# Altium PCB P3_Programming.PcbDoc
Units mil, origin at the board's own origin, x right, y up, seen from the top; angles counter-clockwise.
Board outline 600 x 650 mil, 2 copper layers (Top Layer, Bottom Layer); 2 components, 6 nets, 16 pads, 0 vias.
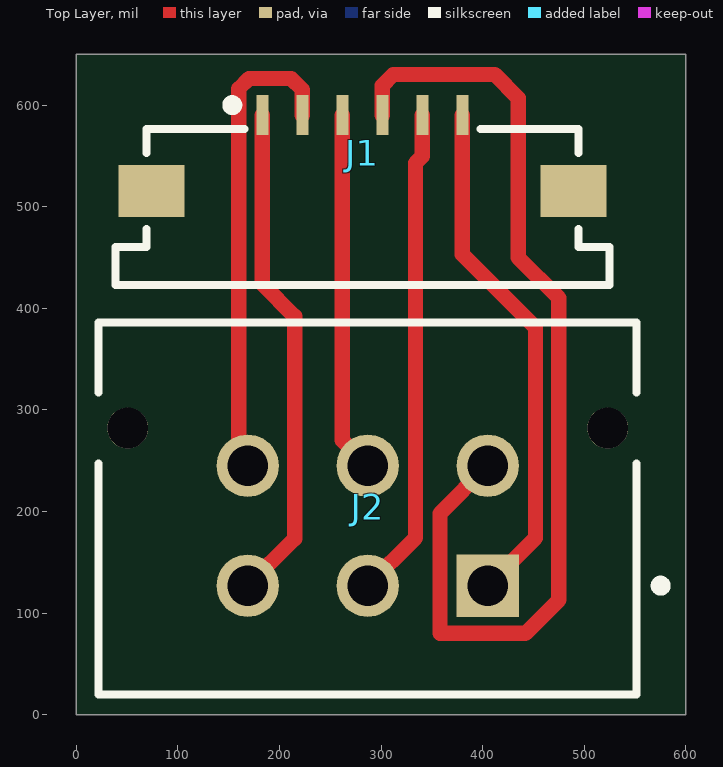
[diagram p0: Top Layer view]
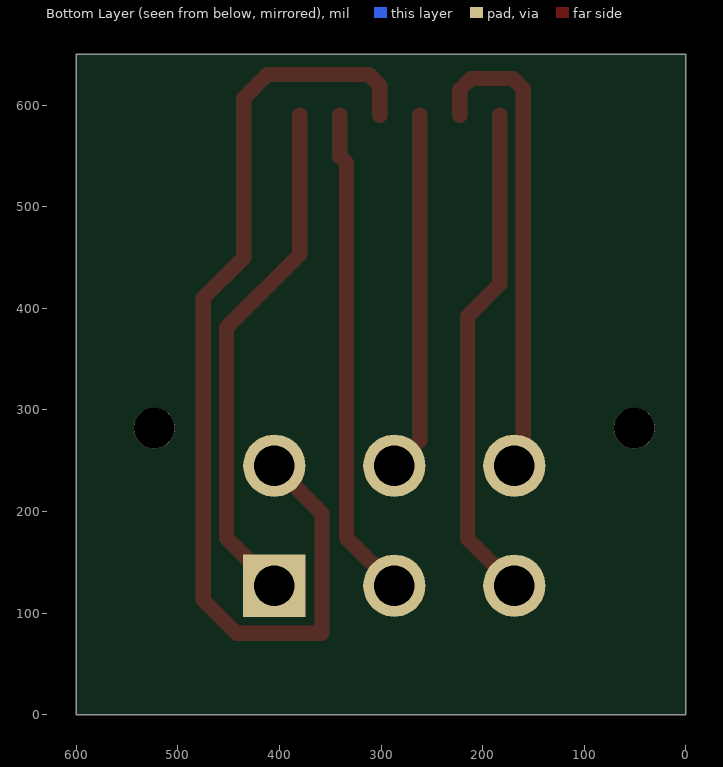
[diagram p1: Bottom Layer view, seen from below]

## Layer stack, top to bottom
Top Solder: solder mask 0.4, Solder Resist, Dk 3.5
Top Layer: signal copper 1.4
Dielectric 1: dielectric 12.6, FR-4, Dk 4.8
Bottom Layer: signal copper 1.4
Bottom Solder: solder mask 0.4, Solder Resist, Dk 3.5

## Board outline
0,0 600,0 600,650 0,650

## Design rules (kind name [scope] priority, off if disabled: settings)
BoardOutlineClearance [All] p1: gap=7.87 ignorepadtopadclearanceinfootprint=FALSE except(15.75: Arc-SplitBarrior Arc-SplitContinuation Track-SplitBarrior Track-SplitContinuation SMDPad-SplitBarrior SMDPad-SplitContinuation THPad-SplitBarrior THPad-SplitContinuation Via-SplitBarrior Via-SplitContinuation Fill-SplitBarrior Fill-SplitContinuation Poly-SplitBarrior Poly-SplitContinuation Region-SplitBarrior Region-SplitContinuation Text-SplitBarrior Text-SplitContinuation)
Clearance "Clearance Bottom Layer" [OnLayer('Bottom Layer')] p1: gap=8 ignorepadtopadclearanceinfootprint=TRUE except(10: Arc-Text Track-Text SMDPad-Text THPad-Text Via-Text Fill-Text Poly-Text Region-Text Text-Text)
Clearance "Clearance Top Layer" [OnLayer('Top Layer')] p2: gap=8 ignorepadtopadclearanceinfootprint=TRUE except(10: Arc-Text Track-Text SMDPad-Text THPad-Text Via-Text Fill-Text Poly-Text Region-Text Text-Text)
Clearance [All] p3: gap=7.87 ignorepadtopadclearanceinfootprint=FALSE except(3.5: Arc-Arc Arc-Track Arc-SMDPad Track-Track Track-SMDPad SMDPad-SMDPad; 5: Arc-Via Track-Via SMDPad-Via THPad-Via Via-Via; 10: Arc-Text Track-Text SMDPad-Text THPad-Text Via-Text Fill-Text Poly-Text Region-Text Text-Text)
HoleSize [All] p1: absolutevalues=TRUE maxlimit=248.03 minlimit=7.87 maxpercent=80.000 minpercent=20.000
MinimumAnnularRing [All] p1: minimumring=3
MinimumSolderMaskSliver [All] p1: minsoldermaskwidth=3.94
PolygonConnect PolygonConnect_1 [All] p1: thpad.connectstyle=Relief thpad.reliefconductorwidth=20 thpad.reliefentries=4 thpad.polygonreliefangle="90 Angle" thpad.airgapwidth=10 smdpad.connectstyle=Relief smdpad.reliefconductorwidth=20 smdpad.reliefentries=4 smdpad.polygonreliefangle="90 Angle" smdpad.airgapwidth=10 via.connectstyle=Direct via.reliefconductorwidth=20 via.reliefentries=4 via.polygonreliefangle="90 Angle" via.airgapwidth=10
RoutingCorners [All] p1: cornerstyle=Round minsetback=100 maxsetback=100
RoutingVias [All] p1: holewidth=19.68 width=39.37 viastyle="Through Hole" minholewidth=7.87 minwidth=17.72 maxholewidth=39.37 maxwidth=78.74
SilkToSilkClearance [All] p1: silktosilkclearance=3.94
SilkToSolderMaskClearance [IsPad] p1: minsilkscreentomaskgap=3.94 clearancetoexposedcopper=TRUE
SolderMaskExpansion [All] p1: expansion=4 istentingtop=FALSE
Width [All] p1: maxlimit=100 minlimit=3.5 preferedwidth=15
25 further rules are at their usual default settings.

## Components (designator, comment, footprint, x,y, rotation, side; value= is the part's Value field where it differs from the comment)
J1 "Communications" 686106183422 281.57,499.45 r0 top
J2 "AVR_1.1" FP-44914-0601-MFG 286.89,202.87 r0 top

## Footprints (in the part's own frame and the unit in brackets; to place one, negate y for a bottom-side part, rotate by r counter-clockwise, add the part's x,y. Pads: shape width x height; smd on the part's side, far side on the other; paste and mask are expansions set on the pad)
686106183422 [mm] "ZIF Connectors, Horizontal, Top Contact Low Profile, pitch 1mm, 6p"
  rect 0.3x1 smd: 1(-2.5,2.3) 2(-1.5,2.3) 3(-0.5,2.3) 4(0.5,2.3) 5(1.5,2.3) 6(2.5,2.3)
  rect 1.65x1.3 smd: M1(-5.275,0.4) M2(5.275,0.4)
  silkscreen extent -6.17,-1.95 6.17,2.67, body extent -6.1,-1.9 6.1,2.35, height 1.28
FP-44914-0601-MFG [mm]
  rect 1.555x1.555 hole 1.005 paste-2539.97 mask+0: 1(3,-1.93)
  round 1.555 hole 1.005 paste-2539.97 mask+0: 2(0,-1.93) 3(-3,-1.93) 4(3,1.07) 5(0,1.07) 6(-3,1.07)
  round 1.02 hole 1.02 unplated paste-2539.97 mask+0: ""(-6,2.01) ""(6,2.01)
  silkscreen extent -6.73,-4.65 7.45,4.65, body extent -6.83,-4.75 6.83,4.75, height 0.25

## Part data
J1: library part CMP-1502-01493-2, "686106183422", Contact Resistance=30mΩ, Current Rating=800mA, Insulation Resistance=100MΩ, Max Operating Temperature=85°C, Min Operating Temperature=-25°C, Operating Supply Voltage=50V, Contact Plating=Tin, Gender=Receptacle, Lead Pitch=1mm, Length=7.1mm, NexarPartId=81848301, Number of Pins=6, Orientation=Horizontal, Packaging="Tape and Reel", Pitch=1mm, RoHS=Compliant
J2: library part CMP-00257-06793009-1, "44914-0601 Conn Power HDR 6 POS 3mm Press Fit ST Thru-Hole 6 Terminal 1 Port Micro-Fit 3.0 CPI™ Tray", Color=Black, Current Rating=5A, Manufacturer Lifecycle Status=ACTIVE, Max Operating Temperature=105°C, Min Operating Temperature=-40°C, Voltage Rating (DC)=250V, Connector Type="Male Pin", Contact Plating=Tin, Country of Origin=US, Depth=8.77mm, Fastening Type=Ramp, Housing Material=Polymer, Lead Pitch=3mm, Length=12.65mm, Lifecycle Status=Production, Mount="Through Hole", NexarPartId=6793009, Number of Circuits=4, Number of Contacts=6, Number of Ports=1, Number of Positions=6, Number of Rows=2, Number of Terminals=6, Orientation=Vertical, Pitch=3mm, Plating=Tin, RoHS=Compliant, Row Spacing=2.9972mm, Schedule B=8536694040, Termination=Press-Fit

## Nets (pads, with @x,y where several pads share a name; then routed paths per layer and width w, separated by ;. In a path a pad name is that pad's centre, name@x,y a point inside that pad or via, vN(x,y) a via of type N, cw(c..) or ccw(c..) an arc to the next point about the centre after c; other vN are vias at no path point)
GND_P3: J1.1 J2.3 | length 495.4
  Top Layer w15: J2.3 215,173.11 215,392 183.15,423.85 J1.1
MISO_1_P3: J1.4 J2.4 | length 1002.7
  Top Layer w15: J1.4 301.26,619.26 312,630 412,630 435,607 435,450 475,410 475,113 442,80 358,80 358,198 J2.4
MOSI_1_P3: J1.5 J2.2 | length 485.4
  Top Layer w15: J2.2 334,174 334,543 340.63,549.63 J1.5
RES_1_P3: J1.2 J2.6 | length 476
  Top Layer w15: J2.6 160,245 160,616 170,626 211.52,626 222.52,615 J1.2
SCK_1_P3: J1.3 J2.5 | length 355.4
  Top Layer w15: J1.3 261.89,270 J2.5
VCC_P3: J1.6 J2.1 | length 512.4
  Top Layer w15: J1.6 380,453 452,381 452,173.89 J2.1
pads on no net: J1.M1 J1.M2 J2.